# EAGLE board CV-module-schematics (EAGLE 6.2)
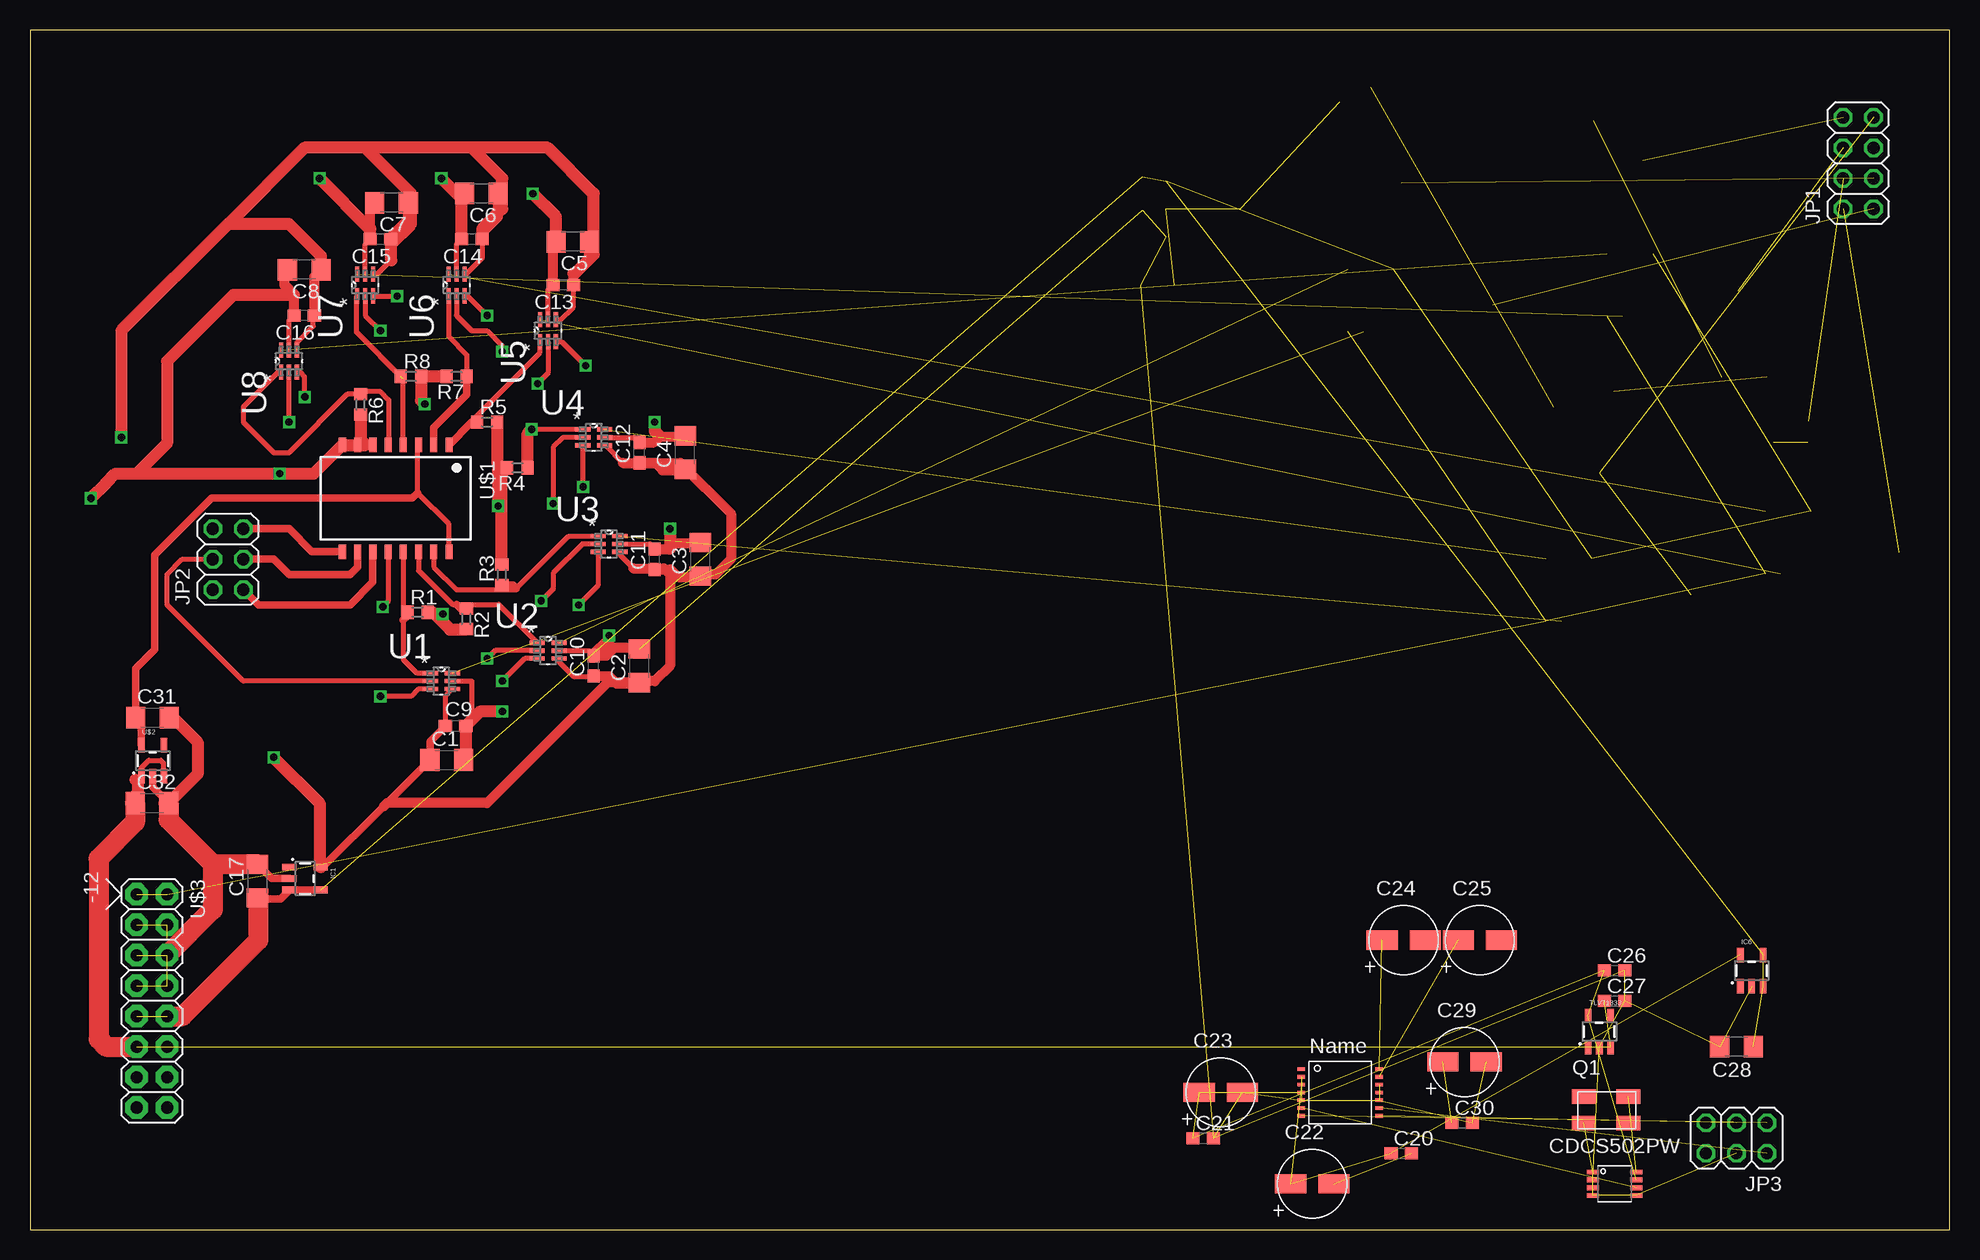
[diagram p0: board, top side]
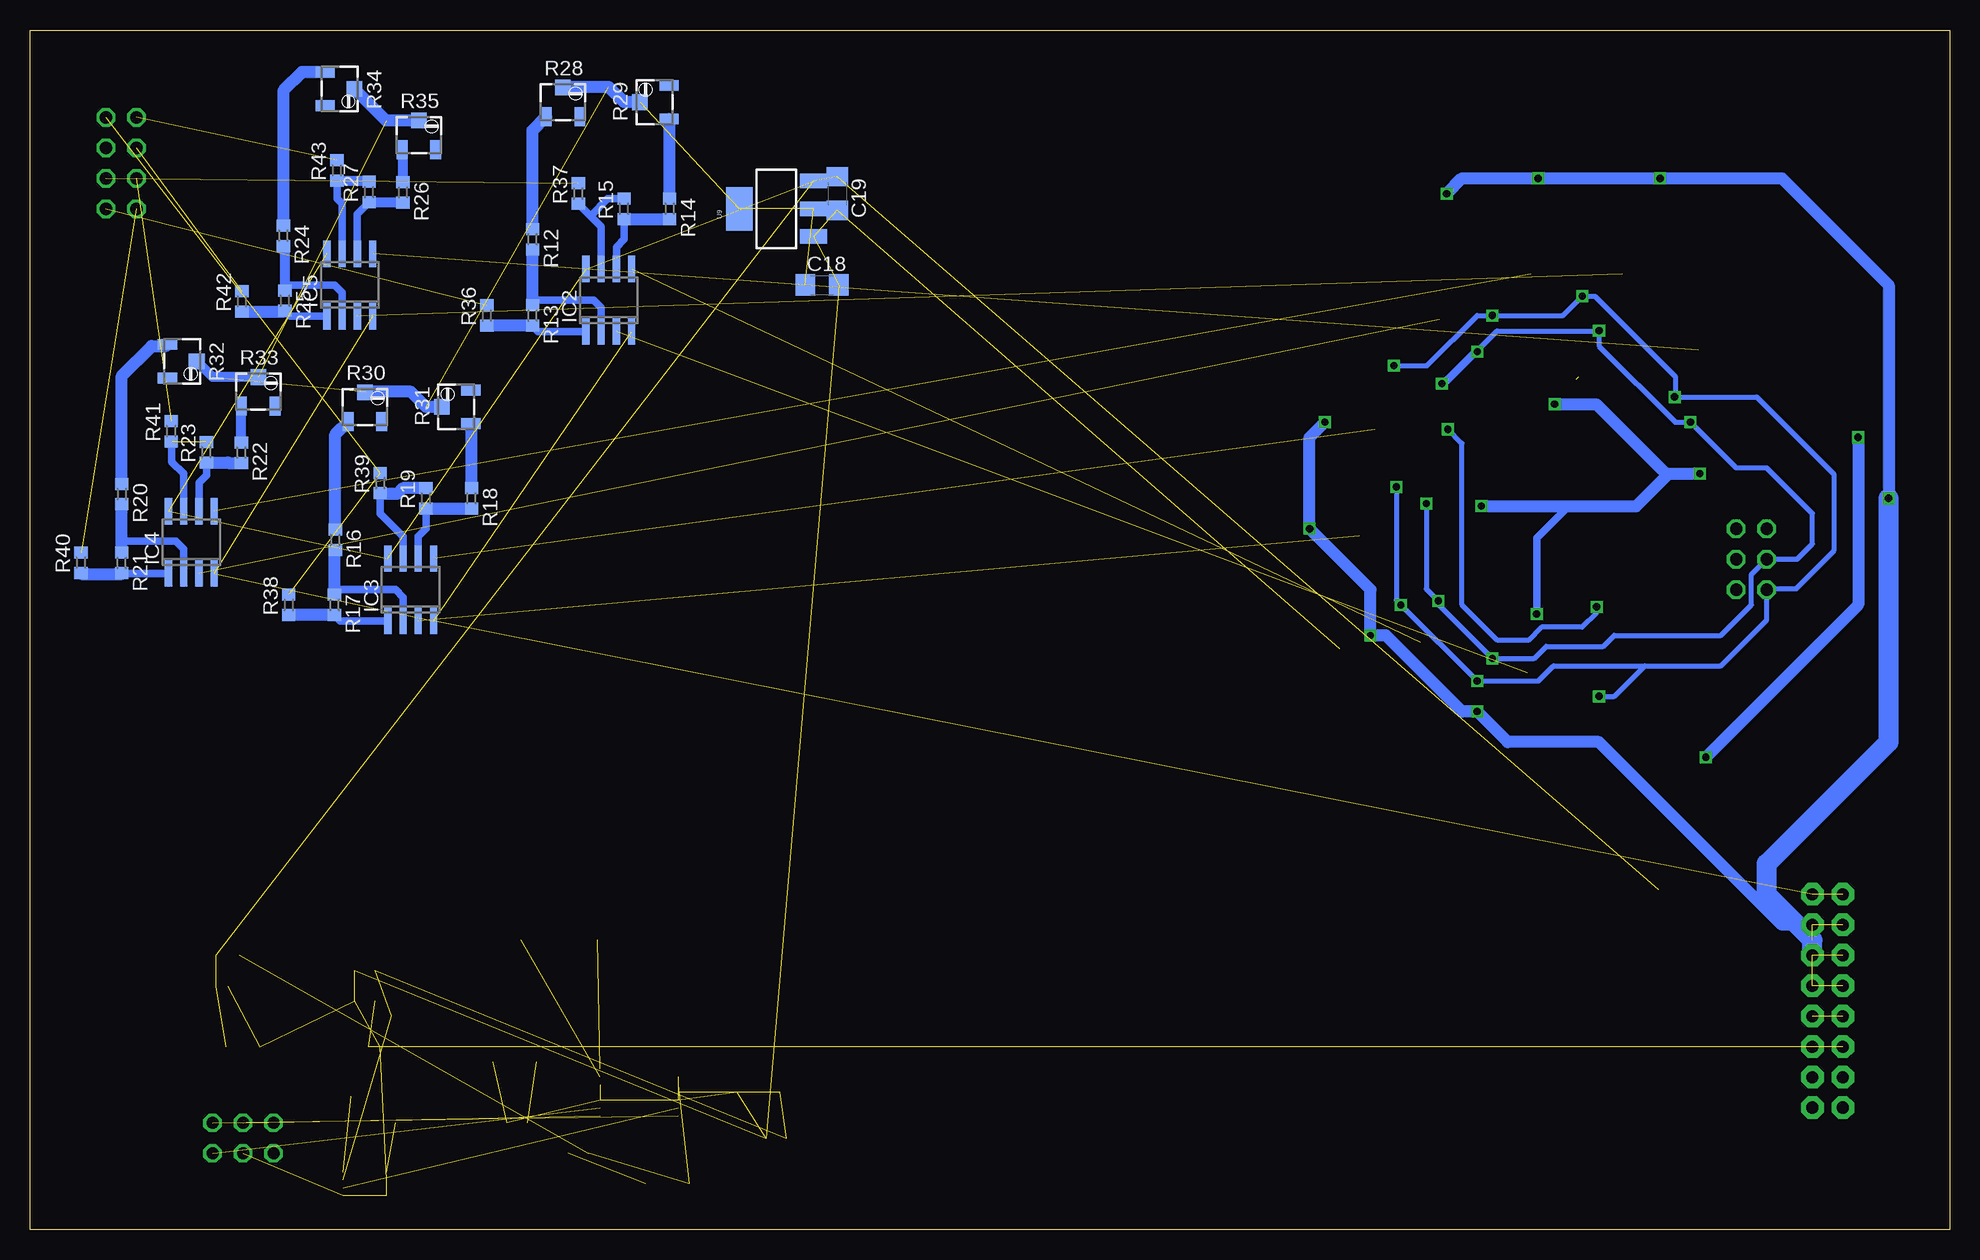
[diagram p1: board, bottom side, seen from below]

Size 160 x 100 mm. Coordinates in mm from the lower left corner, seen from the top.
Outline: 0,0 160,0 160,100 0,100 0,0
Copper layers (1*16): Top 0.035mm / dielectric 1.5mm / Bottom 0.035mm
Design rules: minimum track width 10mil, minimum drill 24mil, track to track 8mil, track to pad 8mil, pad to pad 8mil, via to via 8mil, smd to smd 8mil, copper to edge 40mil, drill to drill 8mil, minimum pad ring 10mil, minimum via ring 8mil, stop-mask expansion 4mil, vias tented up to drill 0mil, thermal gap 10mil

## Footprints (pad centres in the part's own frame; a part is rotated, then mirrored left to right if it is on the bottom)
C1206 = smd 1.6 x 1.8: 1 -1.4,0; 2 1.4,0
C0603 = smd 1.1 x 1: 1 -0.85,0; 2 0.85,0
RADIALCAN4MM = smd 2.6 x 1.6: 1 -1.6,0; 2 2,0
SSOP-8 = smd 1 x 0.4: 1 -1.8,0.975; 2 -1.8,0.325; 3 -1.8,-0.325; 4 -1.8,-0.975; 5 1.8,-0.975; 6 1.8,-0.325; 7 1.8,0.325; 8 1.8,0.975
SOT23-5 = smd 0.55 x 1.2: 1 -0.95,-1.3; 2 0,-1.3; 3 0.95,-1.3; 4 0.95,1.3; 5 -0.95,1.3
SO08 = smd 0.6 x 2.2: 1 -1.905,-2.6; 2 -0.635,-2.6; 3 0.635,-2.6; 4 1.905,-2.6; 5 1.905,2.6; 6 0.635,2.6; 7 -0.635,2.6; 8 -1.905,2.6
2X04 = drill 1.016 octagon: 1 -3.81,-1.27; 2 -3.81,1.27; 3 -1.27,-1.27; 4 -1.27,1.27; 5 1.27,-1.27; 6 1.27,1.27; 7 3.81,-1.27; 8 3.81,1.27
2X03 = drill 1.016 octagon: 1 -2.54,-1.27; 2 -2.54,1.27; 3 0,-1.27; 4 0,1.27; 5 2.54,-1.27; 6 2.54,1.27
R-PDSO-G14 = smd 0.61 x 0.305: 1 -3.25,1.95; 2 -3.25,1.3; 3 -3.25,0.65; 4 -3.25,0; 5 -3.25,-0.65; 6 -3.25,-1.3; 7 -3.25,-1.95; 8 3.25,-1.95; 9 3.25,-1.3; 10 3.25,-0.65; 11 3.25,0; 12 3.25,0.65; 13 3.25,1.3; 14 3.25,1.95
5X3CRYSTAL = smd 2 x 1.2: 1 0,0; 2 3.7,0; 3 3.7,2.2; 4 0,2.2
R0603 = smd 1 x 1.1: 1 -0.85,0; 2 0.85,0
3223W = smd 0.9 x 1.6: 1 -1.4,-1.215; 3 1.4,-1.215 | smd 1.3 x 1.3: 2 0,1.215
SOT65P210X110-6N = smd 1.27 x 0.356: 1 -0.914,0.66; 2 -0.914,0; 3 -0.914,-0.66; 4 0.914,-0.66; 5 0.914,0; 6 0.914,0.66
SOT223 = smd 1.219 x 2.235: 1 -2.311,-3.099; 2 0,-3.099; 3 2.311,-3.099 | smd 3.6 x 2.2: 4 0,3.099
N5 = smd 0.6 x 1.2: 1 -4.445,-4.445; 2 -3.175,-4.445; 3 -1.905,-4.445; 4 -0.635,-4.445; 5 0.635,-4.445; 6 1.905,-4.445; 7 3.175,-4.445; 8 4.445,-4.445; 9 4.445,4.445; 10 3.175,4.445; 11 1.905,4.445; 12 0.635,4.445; 13 -0.635,4.445; 14 -1.905,4.445; 15 -3.175,4.445; 16 -4.445,4.445
POWER_16 = drill 1.016 pad 1.88 octagon: 1 -6.35,-1.27; 2 -6.35,1.27; 3 -3.81,-1.27; 4 -3.81,1.27; 5 -1.27,-1.27; 6 -1.27,1.27; 7 1.27,-1.27; 8 1.27,1.27; 9 3.81,-1.27; 10 3.81,1.27; 11 6.35,-1.27; 12 6.35,1.27; 13 8.89,-1.27; 14 8.89,1.27; 15 11.43,-1.27; 16 11.43,1.27

## Placement (x,y rotation side)
C1  10uF  [C1206]  34.74,39.15 0 top
C2  10uF  [C1206]  50.8,46.99 90 top
C3  10uF  [C1206]  55.88,55.88 90 top
C4  10uF  [C1206]  54.61,64.77 90 top
C5  10uF  [C1206]  45.25,82.35 180 top
C6  10uF  [C1206]  37.63,86.36 180 top
C7  10uF  [C1206]  30.14,85.59 180 top
C8  10uF  [C1206]  22.86,80.01 180 top
C9  0,1uF  [C0603]  35.48,41.99 0 top
C10  0,1uF  [C0603]  46.99,46.99 90 top
C11  0,1uF  [C0603]  52.07,55.88 90 top
C12  0,1uF  [C0603]  50.8,64.77 90 top
C13  0,1uF  [C0603]  44.45,78.74 180 top
C14  0,1uF  [C0603]  36.83,82.55 180 top
C15  0,1uF  [C0603]  29.21,82.55 180 top
C16  0,1uF  [C0603]  22.86,76.2 180 top
C17  10uF  [C1206]  18.97,29.04 90 top
C18  10uF  [C1206]  93.98,78.74 0 bottom
C19  10uF  [C1206]  92.71,86.36 270 bottom
C20  0.1uF  [C0603]  114.3,6.35 0 top
C21  0.1uF  [C0603]  97.79,7.62 0 top
C22  10uF  [RADIALCAN4MM]  106.68,3.81 0 top
C23  10uF  [RADIALCAN4MM]  99.06,11.43 0 top
C24  1uF  [RADIALCAN4MM]  114.3,24.13 0 top
C25  1uF  [RADIALCAN4MM]  120.65,24.13 0 top
C26  0.1uF  [C0603]  132.08,21.59 0 top
C27  0.1uF  [C0603]  132.08,19.05 0 top
C28  [C1206]  142.24,15.24 180 top
C29  10uF  [RADIALCAN4MM]  119.38,13.97 0 top
C30  0.1uF  [C0603]  119.38,8.89 0 top
C31  10uF  [C1206]  10.2,42.68 0 top
C32  10uF  [C1206]  10.16,35.56 0 top
CDCS502PW  CDCS502  [SSOP-8]  132.08,3.81 0 top
IC1  [SOT23-5]  22.93,29.26 270 top
IC2  LM358D  [SO08]  111.76,77.47 0 bottom
IC3  LM358D  [SO08]  128.27,53.34 0 bottom
IC4  LM358D  [SO08]  146.55,57.29 0 bottom
IC5  LM358D  [SO08]  133.35,78.74 0 bottom
IC6  [SOT23-5]  143.51,21.59 0 top
JP1  [2X04]  152.4,88.9 90 top
JP2  [2X03]  16.51,55.88 90 top
JP3  [2X03]  142.24,7.62 180 top
PCM1808  PCM1808PW  [R-PDSO-G14]  109.22,11.43 0 top
Q1  [5X3CRYSTAL]  129.54,8.89 0 top
R1  20k  [R0603]  32.31,51.46 0 top
R2  20k  [R0603]  36.37,50.91 270 top
R3  20k  [R0603]  39.33,54.58 90 top
R4  20k  [R0603]  40.64,63.5 180 top
R5  20k  [R0603]  38.1,67.31 0 top
R6  20k  [R0603]  27.55,68.78 270 top
R7  20k  [R0603]  35.56,71.12 180 top
R8  20k  [R0603]  31.75,71.12 0 top
R12  9.53k  [R0603]  118.11,82.55 270 bottom
R13  10k  [R0603]  118.11,76.2 270 bottom
R14  9.53k  [R0603]  106.68,85.09 270 bottom
R15  10k  [R0603]  110.49,85.09 90 bottom
R16  9.53k  [R0603]  134.55,57.49 270 bottom
R17  10k  [R0603]  134.62,52.07 270 bottom
R18  9.53k  [R0603]  123.19,60.96 270 bottom
R19  10k  [R0603]  127,60.96 90 bottom
R20  9.53k  [R0603]  152.35,61.31 270 bottom
R21  10k  [R0603]  152.36,55.57 270 bottom
R22  9.53k  [R0603]  142.38,64.76 270 bottom
R23  10k  [R0603]  145.3,64.8 90 bottom
R24  9.53k  [R0603]  138.88,82.85 270 bottom
R25  10k  [R0603]  138.75,77.44 270 bottom
R26  9.53k  [R0603]  128.91,86.46 270 bottom
R27  10k  [R0603]  131.74,86.49 90 bottom
R28  [3223W]  115.57,93.98 0 bottom
R29  [3223W]  107.95,93.98 90 bottom
R30  [3223W]  132.08,68.58 0 bottom
R31  [3223W]  124.46,68.58 90 bottom
R32  [3223W]  147.32,72.39 270 bottom
R33  [3223W]  140.97,69.85 0 bottom
R34  [3223W]  134.18,95.09 270 bottom
R35  [3223W]  127.58,91.24 0 bottom
R36  1k  [R0603]  121.92,76.2 90 bottom
R37  1k  [R0603]  114.3,86.36 90 bottom
R38  1k  [R0603]  138.43,52.07 90 bottom
R39  1k  [R0603]  130.81,62.23 90 bottom
R40  1k  [R0603]  155.75,55.59 90 bottom
R41  1k  [R0603]  148.23,66.55 90 bottom
R42  1k  [R0603]  142.34,77.38 90 bottom
R43  1k  [R0603]  134.42,88.29 90 bottom
TLV71333  TVL713  [SOT23-5]  130.81,16.51 0 top
U1  AD5611BKSZ  [SOT65P210X110-6N]  34.29,45.72 0 top
U2  AD5611BKSZ  [SOT65P210X110-6N]  43.18,48.26 0 top
U3  AD5611BKSZ  [SOT65P210X110-6N]  48.26,57.15 0 top
U4  AD5611BKSZ  [SOT65P210X110-6N]  46.99,66.04 0 top
U5  AD5611BKSZ  [SOT65P210X110-6N]  43.18,74.93 90 top
U6  AD5611BKSZ  [SOT65P210X110-6N]  35.56,78.74 90 top
U7  AD5611BKSZ  [SOT65P210X110-6N]  27.94,78.74 90 top
U8  AD5611BKSZ  [SOT65P210X110-6N]  21.59,72.39 90 top
U9  [SOT223]  97.79,85.09 90 bottom
U$1  CD4051BM96  [N5]  30.48,60.96 180 top
U$2  TVL713  [SOT23-5]  10.23,39.08 0 top
U$3  POWER  [POWER_16]  10.16,21.59 270 top

## Library data of the parts
C1-C19 C31 C32 R12-R27 R36-R43 = resistor
C20-C30 R1-R8 = rcl
CDCS502PW = components
IC1 IC6 = SparkFun-PowerIC
IC2-IC5 = linear
JP1-JP3 = pinhead
PCM1808 Q1 TLV71333 U$2 = Pekkas_libraries
R28-R35 = pot
U1-U8 = AD5611BKSZ; MPN: AD5611BKSZ; OC_FARNELL: 2096189; OC_NEWARK: 91T4795; PACKAGE: SC-70-6; SUPPLIER: Analog Devices
U9 = SparkFun-PowerIC; PROD_ID: VREG-08170
U$1 = halo-electronics
U$3 = eurorack

## Nets
3V3: C21.1 C23.1 C26.1 CDCS502PW.7 PCM1808.4 TLV71333.5
3V3MUX: C31.1 U$1.3 U$1.16 U$2.5
5VCC: C20.1 C22.1 IC6.5 PCM1808.3
5VCON: C27.1 C32.1 TLV71333.1 TLV71333.3 U$2.1 U$2.3 U$3.11 U$3.12
+5V: C18.1 R28.2 R29.2 R30.2 R31.2 R32.2 R33.2 R34.2 R35.2 U9.2 U9.4
+12VDC: C17.1 C19.1 C28.1 IC1.3 IC1.4 IC2.8 IC3.8 IC4.8 IC5.8 IC6.3 IC6.4 U9.3 U$3.9 U$3.10
-12VDC: IC2.4 IC3.4 IC4.4 IC5.4 U$3.1 U$3.2
AGND: C20.2 C22.2
CTRL1: JP2.1 U$1.11
CTRL2: JP2.3 U$1.10
CTRL3: JP2.5 U$1.9
CV1: JP1.1 R36.2
CV2: JP1.3 R37.2
CV3: JP1.5
CV4: JP1.7 R38.2 R39.2
CV5: JP1.2 R40.2
CV6: JP1.4 R41.2
CV7: JP1.6 R42.2
CV8: JP1.8 R43.2
GND: C1.2 C2.2 C3.2 C4.2 C5.2 C6.2 C7.2 C8.2 C9.2 C10.2 C11.2 C12.2 C13.2 C14.2 C15.2 C16.2 C17.2 C18.2 C19.2 C21.2 C23.2 C26.2 C27.2 C28.2 C29.2 C30.2 C31.2 C32.2 CDCS502PW.2 CDCS502PW.3 CDCS502PW.4 CDCS502PW.5 IC1.2 IC6.2 JP3.4 PCM1808.2 PCM1808.5 PCM1808.10 PCM1808.11 PCM1808.12 R1.2 R2.2 R3.2 R4.2 R5.2 R6.2 R7.2 R8.2 TLV71333.2 U1.5 U2.5 U3.5 U4.5 U5.5 U6.5 U7.5 U8.5 U9.1 U$1.6 U$1.7 U$1.8 U$2.2 U$3.3 U$3.4 U$3.5 U$3.6 U$3.7 U$3.8
N$1: JP2.2 U1.3 U2.3 U3.3 U4.3 U5.3 U6.3 U7.3 U8.3
N$2: JP2.4 U1.2 U2.2 U3.2 U4.2 U5.2 U6.2 U7.2 U8.2
N$3: C24.1 PCM1808.14
N$4: IC2.2 R12.2 R13.1
N$5: R12.1 R28.1
N$6: IC2.1 R13.2 R36.1
N$7: R14.1 R29.1
N$8: IC2.6 R14.2 R15.1
N$9: IC3.2 R16.2 R17.1
N$10: R16.1 R30.1
N$11: IC3.6 R18.2 R19.1
N$12: R18.1 R31.1
N$13: IC3.7 R19.2 R39.1
N$14: IC3.1 R17.2 R38.1
N$15: IC2.7 R15.2 R37.1
N$16: IC4.2 R20.2 R21.1
N$17: IC4.1 R21.2 R40.1
N$18: IC4.7 R23.2 R41.1
N$19: IC4.6 R22.2 R23.1
N$20: IC5.2 R24.2 R25.1
N$21: IC5.1 R25.2 R42.1
N$22: R24.1 R34.1
N$23: IC5.6 R26.2 R27.1
N$24: IC5.7 R27.2 R43.1
N$25: R26.1 R35.1
N$26: R20.1 R32.1
N$27: R22.1 R33.1
N$28: C25.1 PCM1808.13
N$29: CDCS502PW.1 Q1.1
N$30: CDCS502PW.8 Q1.3
N$31: C29.1 C30.1
N$32: CDCS502PW.6 PCM1808.6
N$33: JP3.1 PCM1808.7
N$34: JP3.2 PCM1808.9
N$35: JP3.3 PCM1808.8
SYNC1: R1.1 U1.1 U$1.13
SYNC2: R2.1 U2.1 U$1.14
SYNC3: R3.1 U3.1 U$1.15
SYNC4: R4.1 U4.1 U$1.12
SYNC5: R5.1 U5.1 U$1.1
SYNC6: R6.1 U8.1 U$1.5
SYNC7: R7.1 U6.1 U$1.2
SYNC8: R8.1 U7.1 U$1.4
VCC: C1.1 C2.1 C3.1 C4.1 C5.1 C6.1 C7.1 C8.1 C9.1 C10.1 C11.1 C12.1 C13.1 C14.1 C15.1 C16.1 IC1.5 U1.4 U2.4 U3.4 U4.4 U5.4 U6.4 U7.4 U8.4
VDAC1: IC2.3 U1.6
VDAC2: IC2.5 U2.6
VDAC3: IC3.3 U3.6
VDAC4: IC3.5 U4.6
VDAC5: IC4.3 U5.6
VDAC6: IC4.5 U6.6
VDAC7: IC5.3 U7.6
VDAC8: IC5.5 U8.6

## Tracks (layer width: path | path; a pad name or v marks a point on that pad's centre or on a via)
3V3  (5 unrouted)
3V3MUX
  Top 0.406: U$1.16 34.92,58.8 32.31,61.41 32.31,65.33 U$1.3
  Top 0.61: 32.31,61.41 31.86,60.96 15.16,60.96 10.41,56.21 10.41,48.36 8.8,46.75 C31.1 9.28,42.2 U$2.5
5VCC  (3 unrouted)
5VCON  (4 unrouted)
  Top 0.406: 8.81,37.51 9.01,37.51 U$2.1 9.28,38.48 9.91,39.11 10.91,39.11 11.11,38.91 11.11,37.85 U$2.3
  Top 1.016: C32.1 8.76,36.16 9.01,36.41 9.01,37.31 8.81,37.51
  Top 1.676: C32.1 8.76,33.96 5.71,30.91 5.71,15.88 6.35,15.24 U$3.11
+5V  (6 unrouted)
  Bottom 0.813: R33.2 144.78,71.06 R32.2
  Bottom 1.016: R35.2 130.33,92.45 R34.2 | R31.2 127,68.58 128.27,69.85 132.03,69.85 R30.2 | R29.2 110.49,93.98 111.76,95.25 115.52,95.25 R28.2
+12VDC  (10 unrouted)
  Top 0.61: 19.05,27.56 20.88,27.56 IC1.3 IC1.4
  Top 1.676: U$3.10 12.7,17.78 19.05,24.13 19.05,27.56 C17.1
-12VDC  (5 unrouted)
AGND  (1 unrouted)
CTRL1
  Top 0.61: U$1.11 28.57,53.98 26.67,52.07 19.05,52.07 JP2.1
CTRL2
  Top 0.61: U$1.10 27.3,55.24 26.67,54.61 21.59,54.61 20.32,55.88 JP2.3
CTRL3
  Top 0.61: U$1.9 23.5,56.52 21.59,58.42 JP2.5
CV1  (1 unrouted)
CV2  (1 unrouted)
CV4  (2 unrouted)
CV5  (1 unrouted)
CV6  (1 unrouted)
CV7  (1 unrouted)
CV8  (1 unrouted)
GND  (via drill 0.6)  (27 unrouted)
  Top 0.406: U1.5 36.83,45.72 36.83,42.49 C9.2 | U2.5 46.57,48.26 C10.2 | U3.5 51.65,57.15 C11.2 | U4.5 50.38,66.04 C12.2 | U5.5 43.18,78.32 C13.2 | U6.5 35.56,82.13 C14.2 | U7.5 27.94,82.13 C15.2 | U8.5 21.59,75.78 C16.2
  Top 0.61: 28.01,65.41 U$1.6 | 35.01,50.01 35.01,50.31 34.31,51.01 34.31,51.21 v34.41,51.31 | U$2.2 10.23,36.89 C32.2 | IC1.2 20.15,29.26 C17.2
  Top 0.813: C16.2 22.01,77.91 21.21,78.71 21.21,79.76 C8.2 | C15.2 28.36,85.21 C7.2 | C14.2 35.98,86.11 C6.2 | C13.2 43.6,82.1 C5.2 | C12.2 52.02,65.62 52.51,66.11 54.55,66.11 C4.2 | C11.2 53.33,56.73 53.81,57.21 55.81,57.21 C3.2 | C10.2 48.04,47.84 48.71,48.51 50.68,48.51 C2.2
  Top 1.016: v5.08,60.96 6.35,62.25 7.11,63.01 8.89,63.01 | 8.89,63.01 v20.81,63.01 23.64,63.01 U$1.8 U$1.7 28,65.41 | 28,65.41 28.01,65.41 | R6.2 27.55,65.86 28,65.41 | R7.2 R8.2 32.6,69.12 v32.91,68.81 | R3.2 39.33,63.04 R4.2 | R5.2 38.95,63.92 39.37,63.5 R4.2 | R4.2 39.2,63.5 39.01,63.31 v39.01,60.31 | R1.2 33.56,51.46 35.01,50.01 36.32,50.01 R2.2 | C31.2 11.93,42.68 13.97,40.64 13.97,37.97 C32.2 | C1.2 36.33,39.34 C9.2 37.52,43.18 v39.37,43.18 | v48.26,49.53 48.26,49.11 C10.2 | v53.34,58.42 53.34,56.74 53.33,56.73 | v52.07,67.31 52.07,66.55 52.51,66.11 | 22.01,77.91 16.95,77.91 11.43,72.39 11.43,65.55 8.89,63.01 | C15.2 28.36,83.4 v24.13,87.63 | C14.2 35.98,85.94 v34.29,87.63 | C5.2 43.85,84.42 v41.91,86.36
  Top 1.676: C32.2 11.56,34.16 15.24,30.48 | 15.24,30.48 15.24,26.67 U$3.6 | C17.2 15.28,30.44 15.24,30.48
  Bottom 0.61: v34.41,51.31 34.41,57.65 31.75,60.31
  Bottom 1.016: v32.91,68.81 29.44,68.81 23.64,63.01 23.41,63.01 | 23.41,63.01 v20.81,63.01 | v39.01,60.31 31.75,60.31 26.11,60.31 23.41,63.01 | U$3.4 13.97,25.4 29.21,40.64 36.83,40.64 v39.37,43.18 40.64,43.18 46.99,49.53 v48.26,49.53 48.26,53.34 v53.34,58.42 53.34,66.04 v52.07,67.31 | v5.08,60.96 5.08,78.74 13.97,87.63 v24.13,87.63 v34.29,87.63 40.64,87.63 v41.91,86.36
  Bottom 1.676: U$3.6 11.43,24.13 15.24,27.94 15.24,30.48 5.08,40.64 v5.08,60.96
N$1  (via drill 0.6)
  Top 0.406: U8.3 22.5,71.48 22.86,71.12 22.86,69.46 v22.91,69.41 | U7.3 30.59,77.83 v30.61,77.81 | U6.3 36.47,77.83 v38.1,76.2 | U5.3 44.3,74.02 v46.31,72.01 | U2.3 41.25,47.6 v39.37,45.72 | U1.3 32.36,45.06 31.75,44.45 v29.21,44.45 | U3.3 47.35,53.7 v45.72,52.07 | U4.3 46.08,61.94 v46.11,61.91
  Bottom 0.406: v46.31,72.01 43.56,72.01 39.37,76.2 v38.1,76.2 32.22,76.2 v30.61,77.81 29.55,77.81 22.86,71.12 22.86,69.46 v22.91,69.41 16.07,69.41 9.61,62.95 9.61,56.61 12.81,53.41 15.17,53.41 JP2.2 15.24,50.8 19.05,46.99 25.4,46.99 | 25.4,46.99 33.02,46.99 34.29,45.72 v39.37,45.72 v45.72,52.07 46.11,52.46 v46.11,61.91 | v29.21,44.45 27.94,44.45 25.4,46.99
N$2  (via drill 0.6)
  Top 0.406: U1.2 17.78,45.72 11.43,52.07 11.43,54.61 12.7,55.88 JP2.4 | v21.59,67.31 U8.2 | U7.2 27.94,76.2 v29.21,74.93 | U5.2 43.18,71.38 v42.31,70.51 | U3.2 46.05,57.15 43.61,54.71 43.61,53.41 v42.61,52.41 | U4.2 44.44,66.04 43.61,65.21 v43.61,60.51 | U6.2 35.56,76.2 36.83,74.93 38.1,74.93 39.37,73.66 39.37,73.2 v39.35,73.18 | U2.2 38.76,48.26 v38.11,47.61
  Bottom 0.406: v43.61,60.51 43.61,53.41 v42.61,52.41 42.61,52.11 v38.11,47.61 34.61,47.61 33.61,48.61 28.86,48.61 27.94,49.53 19.05,49.53 16.51,52.07 16.51,54.61 JP2.4 12.7,55.88 11.43,57.15 11.43,59.69 15.24,63.5 17.78,63.5 v21.59,67.31 22.86,67.31 29.21,73.66 v29.21,74.93 29.23,74.91 37.71,74.91 39.31,73.31 39.31,73.21 42.01,70.51 v42.31,70.51 39.64,73.18 v39.35,73.18
N$3  (1 unrouted)
N$4
  Bottom 0.61: IC2.2 112.39,76.83 113.03,77.47 117.69,77.47 R13.1
  Bottom 1.016: R13.1 R12.2
N$5
  Bottom 1.016: R12.1 118.11,91.62 R28.1
N$6
  Bottom 0.61: IC2.1 117.63,74.87 R13.2
  Bottom 1.016: R13.2 R36.1
N$7
  Bottom 1.016: R14.1 106.68,92.53 R29.1
N$8
  Bottom 0.61: IC2.6 111.12,81.92 110.49,82.55 R15.1
  Bottom 1.016: R15.1 R14.2
N$9
  Bottom 0.61: IC3.2 128.91,52.7 129.54,53.34 134.2,53.34 R17.1
  Bottom 1.016: R17.1 134.62,56.57 R16.2
N$10
  Bottom 1.016: R16.1 134.55,66.3 R30.1
N$11
  Bottom 0.61: IC3.6 127.64,57.78 127,58.42 R19.1
  Bottom 1.016: R19.1 R18.2
N$12
  Bottom 1.016: R18.1 123.19,67.12 R31.1
N$13
  Bottom 0.61: IC3.7 128.91,57.78 130.81,59.69 R39.1
  Bottom 1.016: R19.2 128.92,61.81 129.4,61.33 130.76,61.33 R39.1
N$14
  Bottom 0.61: IC3.1 134.14,50.74 R17.2
  Bottom 1.016: R17.2 R38.1
N$15
  Bottom 0.61: IC2.7 112.39,83.61 113.28,84.5 | 113.28,84.5 R37.1 | R15.2 111.84,85.94 113.28,84.5
N$16
  Bottom 0.61: IC4.2 147.19,56.72 147.87,57.4 152.11,57.4 152.36,57.15
  Bottom 1.016: R21.1 152.36,57.15 R20.2
N$17
  Bottom 0.61: IC4.1 152.33,54.69 R21.2
  Bottom 1.016: R21.2 152.36,54.65 152.4,54.61 155.62,54.61 R40.1
N$18  (1 unrouted)
  Bottom 0.61: IC4.7 147.19,63.02 148.17,64 148.17,65.64 R41.1
N$19
  Bottom 0.61: IC4.6 145.91,62.26 145.27,62.9 145.27,63.92 R23.1
  Bottom 1.016: R23.1 143.52,63.95 143.47,63.9 R22.2
N$20
  Bottom 0.61: IC5.2 133.99,78.11 134.62,78.74 138.43,78.74 138.43,78.61 R25.1
  Bottom 0.813: R25.1 138.75,81.87 R24.2
N$21
  Bottom 0.61: IC5.1 138.3,76.14 R25.2
  Bottom 1.016: R42.1 138.81,76.53 R25.2
N$22
  Bottom 1.016: R34.1 137.33,96.49 138.89,94.93 R24.1
N$23
  Bottom 0.61: IC5.6 132.72,84.67 R27.1
  Bottom 0.813: R27.1 128.94,85.64 R26.2
N$24
  Bottom 0.61: IC5.7 133.99,85.53 134.39,85.93 134.39,87.41 R43.1
  Bottom 0.813: R43.1 131.84,87.44 R27.2
N$25
  Bottom 0.813: R26.1 128.91,89.95 R35.1
N$26
  Bottom 1.016: R20.1 152.35,71.17 149.86,73.66 148.66,73.66 R32.1
N$27
  Bottom 0.813: R22.1 R33.1
N$28  (1 unrouted)
N$29  (1 unrouted)
N$30  (1 unrouted)
N$31  (1 unrouted)
N$32  (1 unrouted)
N$33  (1 unrouted)
N$34  (1 unrouted)
N$35  (1 unrouted)
SYNC1
  Top 0.406: U$1.13 31.11,50.8 31.11,47.51 32.21,46.41 33.35,46.41 U1.1
  Top 0.61: R1.1 31.46,51.15 31.11,50.8
SYNC2
  Top 0.406: U$1.14 32.38,54.94 35.21,52.11 35.56,52.11 39.08,52.11 U2.1
  Top 0.61: R2.1 35.91,51.76 35.56,52.11
SYNC3
  Top 0.406: U$1.15 33.66,55.24 35.56,53.34 40.44,53.34 40.54,53.44 44.91,57.81 U3.1
  Top 0.61: R3.1 40.25,53.73 40.54,53.44
SYNC4  (via drill 0.6)
  Top 0.406: U$1.12 29.84,52.34 v29.41,51.91 | v41.81,66.71 46.07,66.71 U4.1
  Top 1.016: R4.1 41.49,66.39 v41.81,66.71
  Bottom 0.406: v41.81,66.71 40.64,65.54 40.64,52.07 37.68,49.11 35.11,49.11 34.01,50.21 30.61,50.21 29.41,51.41 v29.41,51.91
SYNC5
  Top 0.406: U$1.1 34.92,65.53 42.51,73.11 42.51,74.01 U5.1
  Top 0.61: R5.1 36.83,67.31 U$1.1
SYNC6
  Top 0.406: U8.1 20.68,71.48 17.78,68.58 17.78,67.31 20.32,64.77 21.59,64.77 26.45,69.63 R6.1 27.77,69.85 29.21,69.85 29.91,69.15 29.91,65.47 U$1.5
SYNC7
  Top 0.406: U6.1 34.9,74.42 36.41,72.91 R7.1
  Top 0.61: U$1.2 33.66,66.86 36.41,69.61 R7.1
SYNC8  (1 unrouted)
  Top 0.406: U$1.4 31.11,70.91 27.21,74.81 27.21,77.76 U7.1
VCC  (via drill 0.6)
  Top 0.406: C9.1 34.63,44.48 U1.4 | U2.4 44.09,47.33 45.31,46.11 46.96,46.11 C10.1 | U3.4 49.17,56.25 50.31,55.11 51.99,55.11 C11.1 | U4.4 47.94,65.38 49.41,63.91 C12.1 | U5.4 44.24,75.84 45.31,76.91 C13.1 | U6.4 36.35,79.65 37.71,81.01 37.71,82.52 C14.1 | U7.4 28.95,79.65 30.11,80.81 30.11,82.5 C15.1 | U8.4 22.25,73.95 23.61,75.31 23.61,76.1 C16.1
  Top 0.61: IC1.5 24.4,30.21 29.48,35.29 C1.1 33.34,40.7 C9.1
  Top 0.813: C16.1 23.71,79.46 C8.1 | C15.1 30.06,82.76 31.51,84.21 31.51,85.56 C7.1 | 37.71,82.52 37.71,83.11 39.01,84.41 39.01,86.34 C6.1 | C13.1 45.31,79.71 46.61,81.01 46.61,82.31 C5.1 | C12.1 52.1,63.92 52.71,63.31 54.55,63.31 C4.1 | C11.1 53.39,55.03 54.01,54.41 55.81,54.41 C3.1 56.01,54.61 57.15,54.61 58.42,55.88 58.42,59.69 54.2,63.91 49.41,63.91 | C10.1 48.28,46.14 48.91,45.51 50.72,45.51 C2.1 | C2.1 48.13,45.59 38.1,35.56 29.75,35.56 29.48,35.29 | 50.31,55.11 52.84,55.11 53.34,54.61 53.34,46.99 52.07,45.72 50.93,45.72 C2.1
  Top 1.016: C8.1 24.26,81.15 21.59,83.82 16.51,83.82 | 16.51,83.82 7.62,74.93 v7.62,66.04 | v20.32,39.37 24.13,35.56 24.13,30.31 IC1.5 | 30.11,80.81 30.11,82.18 31.75,83.82 31.75,86.36 27.94,90.17 | 27.94,90.17 22.86,90.17 16.51,83.82 | 37.71,83.11 37.71,83.43 39.37,85.09 39.37,87.63 36.83,90.17 | 36.83,90.17 27.94,90.17 | 45.31,79.71 45.42,79.71 46.99,81.28 46.99,86.36 43.18,90.17 36.83,90.17
  Bottom 1.016: v7.62,66.04 7.62,52.07 v20.32,39.37
VDAC1  (1 unrouted)
VDAC2  (1 unrouted)
VDAC3  (1 unrouted)
VDAC4  (1 unrouted)
VDAC5  (1 unrouted)
VDAC6  (1 unrouted)
VDAC7  (1 unrouted)
VDAC8  (1 unrouted)